# Altium PCB placa.pcbdoc
Units mm, origin at the board's own origin, x right, y up, seen from the top; angles counter-clockwise.
Board outline 140.97 x 110.49 mm, 2 copper layers (Top Layer, Bottom Layer); 32 components, 92 nets, 188 pads, 0 vias.
Unrouted connection lines stored in the file: 7.
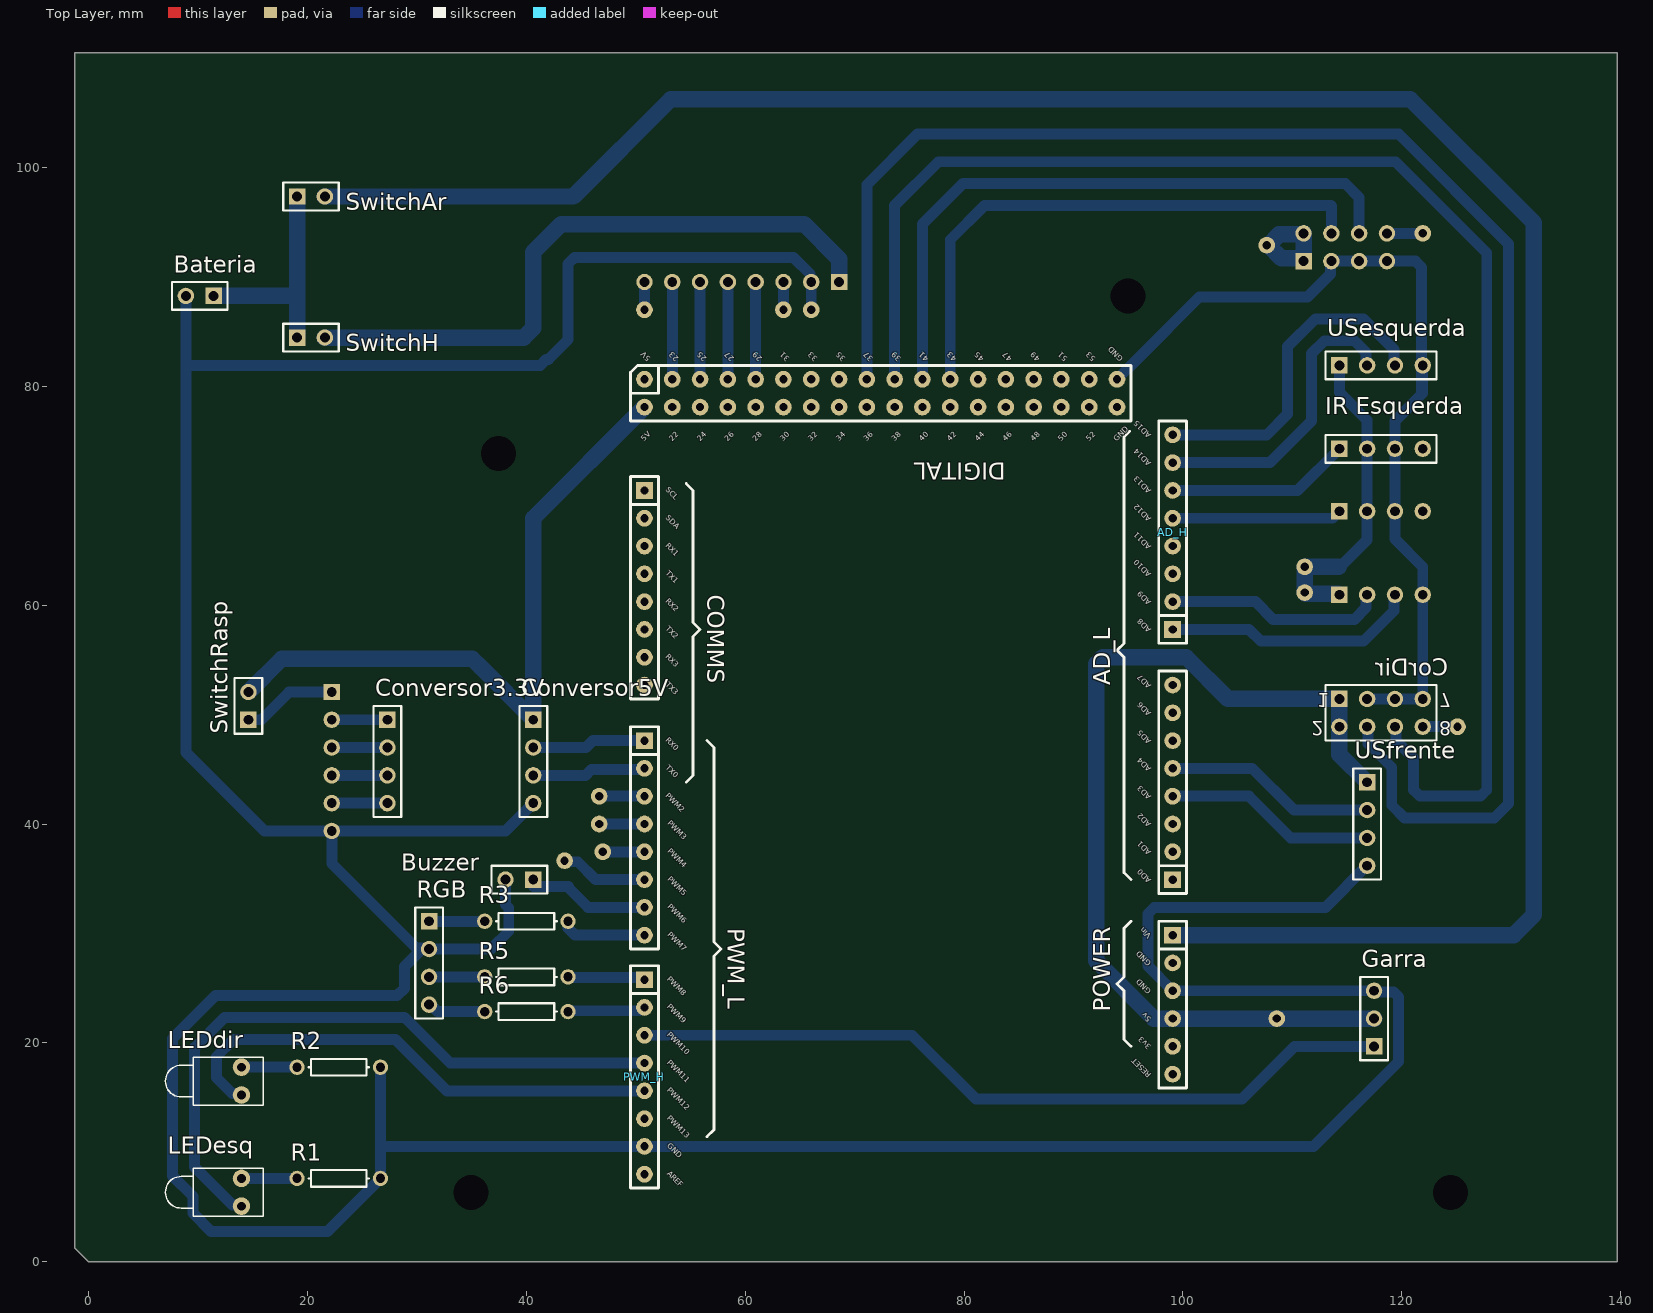
[diagram p0: Top Layer view]
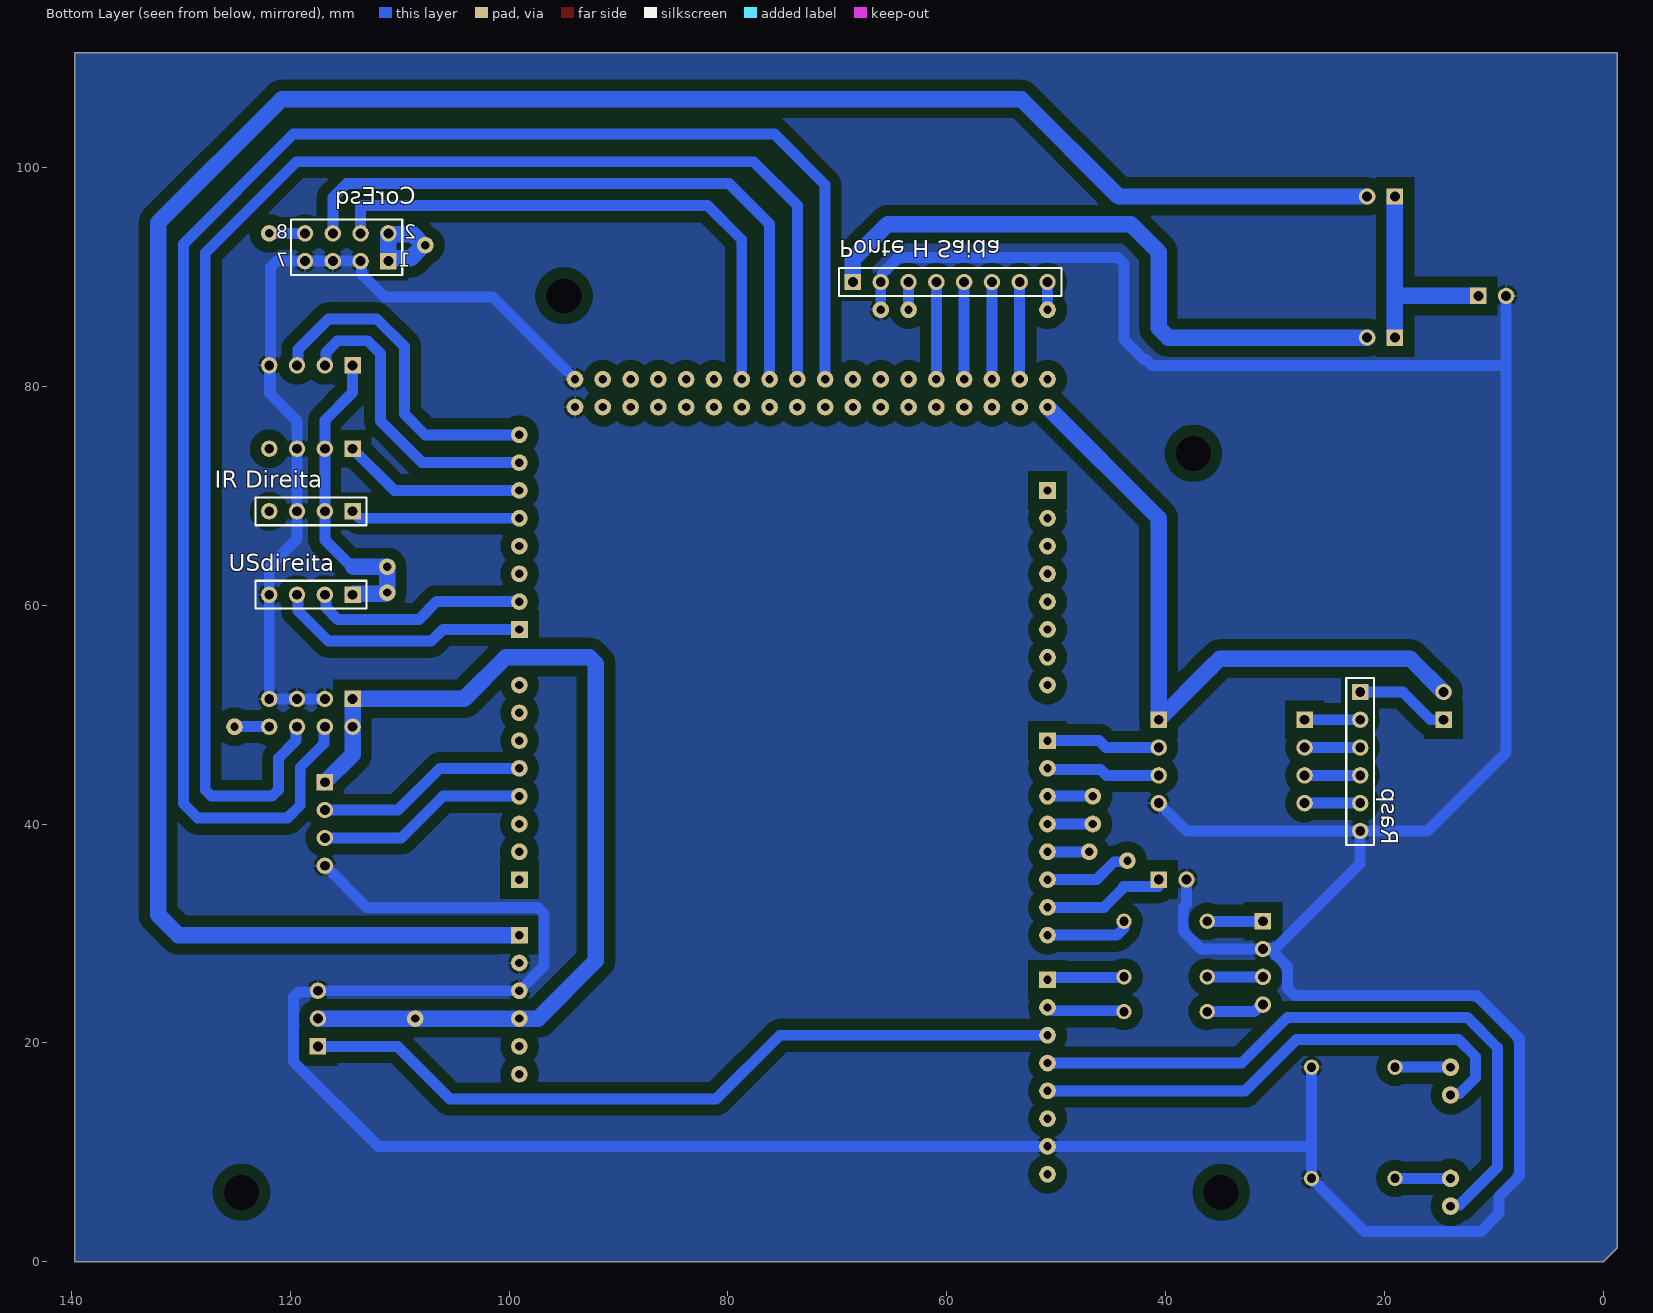
[diagram p1: Bottom Layer view, seen from below]

## Layer stack, top to bottom
Top Solder: solder mask 0.0102, Solder Resist, Dk 3.5
Top Layer: signal copper 0.0356
Dielectric1: dielectric 0.32, FR-4, Dk 4.8
Bottom Layer: signal copper 0.0356
Bottom Solder: solder mask 0.0102, Solder Resist, Dk 3.5

## Board outline
0,0 -1.27,1.27 -1.27,110.49 139.7,110.49 139.7,0

## Design rules (kind name [scope] priority, off if disabled: settings)
Clearance [All] p1: gap=1 ignorepadtopadclearanceinfootprint=FALSE
PolygonConnect [All] p1: connectstyle=Relief reliefconductorwidth=0.254 reliefentries=4 polygonreliefangle="90 Angle" airgapwidth=0.254
RoomDefinition AdruinoMegaSheild [InComponentClass('AdruinoMegaSheild')] p1: confinementstyle=ConfineOut formatcopy=TRUE lockcomponents=FALSE outline 78.105,41.91 78.105,55.88 73.533,55.88 73.533,41.91
RoutingLayers [All] p1: top layer_v5=FALSE bottom layer_v5=TRUE
RoutingVias [All] p1: holewidth=0.711 width=1.27 viastyle="Through Hole" minholewidth=0.711 minwidth=1.27 maxholewidth=0.711 maxwidth=1.27
SilkToSolderMaskClearance SilkscreenOverComponentPads [IsPad] p1: minsilkscreentomaskgap=0.254 clearancetoexposedcopper=TRUE
SolderMaskExpansion [All] p1: expansion=0.102
Width [All] p1: maxlimit=1.5 minlimit=0.8 preferedwidth=1
28 further rules are at their usual default settings.

## Components (designator, comment, footprint, x,y, rotation, side; value= is the part's Value field where it differs from the comment)
AD_H "AD_H" "Header 8x1 8.5mm" 99.06,57.785 r90 top locked
AD_L "AD_L" "Header 8x1 8.5mm" 99.06,34.925 r90 top locked
Bateria "Bateria" HDR1X2 11.43,88.265 r180 top
Buzzer "Header 2" HDR1X2 40.64,34.925 r180 top
COMMS "Communication" "Header 8x1 8.5mm" 50.8,70.485 r270 top
Conversor3.3V "Header 4" HDR1X4 27.305,49.53 r270 top
Conversor5V "Header 4" HDR1X4 40.64,49.53 r270 top
CorDir "Header 4X2" HDR2X4 114.3,51.435 r0 top
CorEsq "Header 4X2" HDR2X4 111.029,91.44 r0 bottom
DIGITAL "IO_36" "HEADER 36X 8MM" 50.8,80.645 r0 top locked
Garra "Header 3" HDR1X3 117.475,19.685 r90 top
"IR Direita" "Header 4" HDR1X4 114.3,68.58 r0 bottom
"IR Esquerda" "Header 4" HDR1X4 114.3,74.295 r0 top
LEDdir "LED1" LED-1 13.97,16.51 r180 top
LEDesq "LED1" LED-1 13.97,6.35 r180 top
"Ponte H Saida" "Header 8" HDR1X8 68.58,89.535 r180 bottom
POWER "POWER" "Header 6x1 8.5mm" 99.06,29.845 r270 top locked
PWM_H "PWM_H" "Header 8x1 8.5mm" 50.8,25.781 r270 top locked
PWM_L "PWM_L" "Header 8x1 8.5mm" 50.8,47.625 r270 top locked
R1 "Res1" AXIAL-0.3 22.86,7.62 r0 top value=47
R2 "Res1" AXIAL-0.3 22.86,17.78 r0 top value=47
R3 "res" AXIAL-0.3 40.005,31.115 r0 top value=330
R5 "res" AXIAL-0.3 40.005,26.035 r0 top value=330
R6 "res" AXIAL-0.3 40.005,22.86 r0 top value=330
Rasp "Header 6" HDR1X6 22.225,52.07 r270 bottom
RGB "Header 4" HDR1X4 31.115,31.115 r270 top
SwitchAr "Switch" HDR1X2 19.05,97.348 r0 top
SwitchH "Switch" HDR1X2 19.05,84.455 r0 top
SwitchRasp "Switch" HDR1X2 14.605,49.53 r90 top
USdireita "Header 4" HDR1X4 114.3,60.96 r0 bottom
USesquerda "Header 4" HDR1X4 114.3,81.915 r0 top
USfrente "Header 4" HDR1X4 116.84,43.815 r270 top

## Footprints (in the part's own frame and the unit in brackets; to place one, negate y for a bottom-side part, rotate by r counter-clockwise, add the part's x,y. Pads: shape width x height; smd on the part's side, far side on the other; paste and mask are expansions set on the pad)
AXIAL-0.3 [mm] "Axial Device, Thru-Hole; 2 Leads; 0.3 in Pin Spacing"
  round 1.4 hole 0.85: 1(-3.81,0) 2(3.81,0)
  silkscreen extent -2.77,-0.76 2.77,0.76
HDR1X2 [mm] "Connector; Header; 2 Position"
  rect 1.5x1.5 hole 0.9: 1(0,0)
  round 1.5 hole 0.9: 2(2.54,0)
  silkscreen extent -1.27,-1.27 3.81,1.27
HDR1X3 [mm] "Connector; Header; 3 Position"
  rect 1.5x1.5 hole 0.9: 1(0,0)
  round 1.5 hole 0.9: 2(2.54,0) 3(5.08,0)
  silkscreen extent -1.27,-1.27 6.35,1.27
HDR1X4 [mm] "Connector; Header; 4 Position"
  rect 1.5x1.5 hole 0.9: 1(0,0)
  round 1.5 hole 0.9: 2(2.54,0) 3(5.08,0) 4(7.62,0)
  silkscreen extent -1.27,-1.27 8.89,1.27
HDR1X6 [mm] "Connector; Header; 6 Position"
  rect 1.5x1.5 hole 0.9: 1(0,0)
  round 1.5 hole 0.9: 2(2.54,0) 3(5.08,0) 4(7.62,0) 5(10.16,0) 6(12.7,0)
  silkscreen extent -1.27,-1.27 13.97,1.27
HDR1X8 [mm] "Connector; Header; 8 Position"
  rect 1.5x1.5 hole 0.9: 1(0,0)
  round 1.5 hole 0.9: 2(2.54,0) 3(5.08,0) 4(7.62,0) 5(10.16,0) 6(12.7,0) 7(15.24,0) 8(17.78,0)
  silkscreen extent -1.27,-1.27 19.05,1.27
HDR2X4 [mm] "Connector; Header; 4x2 Position"
  rect 1.5x1.5 hole 0.9: 1(0,0)
  round 1.5 hole 0.9: 2(0,-2.54) 3(2.54,0) 4(2.54,-2.54) 5(5.08,0) 6(5.08,-2.54) 7(7.62,0) 8(7.62,-2.54)
  silkscreen extent -1.27,-3.81 8.89,1.27
"Header 6x1 8.5mm" [mil] "Stackable 6 pin header"
  rect 60x60 hole 30: 1(0,0)
  round 60 hole 30: 2(100,0) 3(200,0) 4(300,0) 5(400,0) 6(500,0)
  silkscreen extent -50,-50 550,50, body extent -50,-50 550,50, height 335
"Header 8x1 8.5mm" [mil] "Stackable 8 pin header"
  rect 60x60 hole 30: 1(0,0)
  round 60 hole 30: 2(100,0) 3(200,0) 4(300,0) 5(400,0) 6(500,0) 7(600,0) 8(700,0)
  silkscreen extent -50,-50 750,50, body extent -50,-50 750,50, height 335
"HEADER 36X 8MM" [mil] "Stackable 10 pin header"
  round 60 hole 30: 1(0,0) 2(0,-100) 3(100,0) 4(100,-100) 5(200,0) 6(200,-100) 7(300,0) 8(300,-100) 9(400,0) 10(400,-100) 11(500,0) 12(500,-100) 13(600,0) 14(600,-100) 15(700,0) 16(700,-100) 17(800,0) 18(800,-100) 19(900,-100) 20(900,0) 21(1000,0) 22(1000,-100) 23(1100,0) 24(1100,-100) 25(1200,0) 26(1200,-100) 27(1300,0) 28(1300,-100) 29(1400,0) 30(1400,-100) 31(1500,0) 32(1500,-100) 33(1600,0) 34(1600,-100) 35(1700,0) 36(1700,-100)
  silkscreen extent -50,-150 1750,50, body extent -50,-150 1750,50, height 335
LED-1 [mm] "LED; 2 Leads"
  round 1.6 hole 0.8: 1(0,1.27) 2(0,-1.27)
  silkscreen extent -2,-2.2 6.95,2.2

## Part data
Bateria SwitchAr SwitchH SwitchRasp: library part "Header 2", "Header, 2-Pin", LatestRevisionDate=17-Jul-2002, LatestRevisionNote="Re-released for DXP Platform.", Publisher="Altium Limited"
Buzzer: "Header, 2-Pin", LatestRevisionDate=17-Jul-2002, LatestRevisionNote="Re-released for DXP Platform.", Publisher="Altium Limited"
Conversor3.3V Conversor5V "IR Direita" "IR Esquerda" RGB USdireita USesquerda USfrente: "Header, 4-Pin", LatestRevisionDate=17-Jul-2002, LatestRevisionNote="Re-released for DXP Platform.", Publisher="Altium Limited"
CorDir CorEsq: "Header, 4-Pin, Dual row", LatestRevisionDate=17-Jul-2002, LatestRevisionNote="Re-released for DXP Platform.", Publisher="Altium Limited"
Garra: "Header, 3-Pin", LatestRevisionDate=17-Jul-2002, LatestRevisionNote="Re-released for DXP Platform.", Publisher="Altium Limited"
LEDdir LEDesq: "Typical RED GaAs LED", LatestRevisionDate=08-Jul-2005, LatestRevisionNote="Mech Layer 1 removed.", PackageDescription="LED; 2 Leads", PackageReference=LED-1, Published=8-Jun-2000, Publisher="Altium Limited"
"Ponte H Saida": "Header, 8-Pin", LatestRevisionDate=17-Jul-2002, LatestRevisionNote="Re-released for DXP Platform.", Publisher="Altium Limited"
R1 R2: "Resistor", LatestRevisionDate=17-Jul-2002, LatestRevisionNote="Re-released for DXP Platform.", PackageDescription="Axial Device, Thru-Hole; 2 Leads; 0.3 in Pin Spacing", PackageReference=AXIAL-0.3, Published=8-Jun-2000, Publisher="Altium Limited"
R3 R5 R6: library part Res1, "Resistor", LatestRevisionDate=17-Jul-2002, LatestRevisionNote="Re-released for DXP Platform.", PackageDescription="Axial Device, Thru-Hole; 2 Leads; 0.3 in Pin Spacing", PackageReference=AXIAL-0.3, Published=8-Jun-2000, Publisher="Altium Limited"
Rasp: "Header, 6-Pin", LatestRevisionDate=17-Jul-2002, LatestRevisionNote="Re-released for DXP Platform.", Publisher="Altium Limited"

## Free pads (board coordinates)
  round 1.6 hole 3.2: 0(34.925,6.35) 0(37.465,73.879) 0(94.988,88.265) 0(124.46,6.35)
  round 1.524 hole 0.762: 2(46.656,42.545) 3(46.656,40.005) 4(50.8,86.995) 5(63.5,86.995) 6(66.04,86.995) 9(125.095,48.895) 10(121.92,93.98) 11(46.99,37.465) 12(43.497,36.657) 13(107.662,92.903) 14(111.125,63.5) 15(111.125,61.153) 16(108.585,22.225)

## Nets (pads, with @x,y where several pads share a name; then routed paths per layer and width w, separated by ;. In a path a pad name is that pad's centre, name@x,y a point inside that pad or via, vN(x,y) a via of type N, cw(c..) or ccw(c..) an arc to the next point about the centre after c; other vN are vias at no path point)
3V3: POWER.5
5V: "IR Direita.2" "IR Esquerda.2" Conversor5V.1 CorDir.1 CorDir.2 CorEsq.1 CorEsq.2 DIGITAL.1 DIGITAL.2 Garra.2 pad.13 pad.14 pad.15 pad.16 POWER.4 SwitchRasp.2 USdireita.1 USesquerda.1 USfrente.1 | length 189.4
  Bottom Layer w1: pad.13 pad.13@107.803,92.903 ; CorEsq.1@110.779,91.69 CorEsq.1 ; CorEsq.2@110.934,93.884 CorEsq.2 ; pad.15 pad.15@111.222,61.057 ; USdireita.1@114.203,61.057 USdireita.1 ; 114.232,63.5 114.3,63.432 116.84,65.972 116.84,68.58 116.84,74.295 116.84,76.903 114.3,79.443 USesquerda.1
  Bottom Layer w1.5: SwitchRasp.2 17.648,55.113 35.057,55.113 35.85,54.32 Conversor5V.1 40.64,67.945 DIGITAL.2 ; CorEsq.1@110.779,91.69 109.017,91.69 107.803,92.903 108.784,93.884 CorEsq.2@110.934,93.884 ; CorEsq.1 CorEsq.2 ; pad.15 pad.14 114.232,63.5 ; pad.15@111.222,61.057 USdireita.1@114.203,61.057 ; USfrente.1 114.3,46.355 CorDir.2 CorDir.1 104.115,51.435 100.305,55.245 92.661,55.245 92.075,54.659 92.075,27.498 97.348,22.225 POWER.4 pad.16 Garra.2
AD0: AD_L.1
AD1: AD_L.2
AD2: AD_L.3
AD3: AD_L.4 USfrente.3 | length 19.4
  Bottom Layer w1: AD_L.4 106.048,42.545 109.858,38.735 USfrente.3
AD4: AD_L.5 USfrente.2 | length 19.4
  Bottom Layer w1: AD_L.5 106.337,45.085 110.147,41.275 USfrente.2
AD5: AD_L.6
AD6: AD_L.7
AD7: AD_L.8
AD8: AD_H.1 USdireita.3 | length 23.3
  Bottom Layer w1: AD_H.1 106.048,57.785 107.123,56.71 116.5,56.71 119.284,59.495 119.284,60.864 USdireita.3
AD9: AD_H.2 USdireita.2 | length 20
  Bottom Layer w1: AD_H.2 106.629,60.325 108.244,58.71 115.671,58.71 116.744,59.783 116.744,60.864 USdireita.2
AD10: AD_H.3
AD11: AD_H.4
AD12: "IR Direita.1" AD_H.5 | length 15.5
  Bottom Layer w1: AD_H.5 113.665,67.945 114.3,68.58
AD13: "IR Esquerda.1" AD_H.6 | length 16.8
  Bottom Layer w1: AD_H.6 110.49,70.485 114.3,74.295
AD14: AD_H.7 USesquerda.2 | length 27.6
  Bottom Layer w1: AD_H.7 107.95,73.025 111.76,76.835 111.76,82.996 112.929,84.165 115.671,84.165 116.744,83.092 116.744,82.011 USesquerda.2
AD15: AD_H.8 USesquerda.3 | length 30.9
  Bottom Layer w1: AD_H.8 107.662,75.565 109.567,77.47 109.567,83.631 112.1,86.165 116.5,86.165 119.284,83.38 119.284,82.011 USesquerda.3
AGND: Conversor3.3V.4 Rasp.5 | length 5.1
  Bottom Layer w1: Rasp.5 Conversor3.3V.4
AREF: PWM_H.8
ASCL: Conversor3.3V.2 Rasp.3 | length 5.1
  Bottom Layer w1: Rasp.3 Conversor3.3V.2
ASDA: Conversor3.3V.3 Rasp.4 | length 5.1
  Bottom Layer w1: Rasp.4 Conversor3.3V.3
AVCC: Conversor3.3V.1 Rasp.2 | length 5.1
  Bottom Layer w1: Rasp.2 Conversor3.3V.1
GND: "IR Direita.3" "IR Esquerda.3" "Ponte H Saida.2" Bateria.2 Buzzer.2 Conversor5V.4 CorDir.3 CorDir.5 CorDir.7 CorEsq.3 CorEsq.5 CorEsq.7 DIGITAL.35 DIGITAL.36 Garra.3 pad.6 POWER.2 POWER.3 PWM_H.7 R1.2 R2.2 Rasp.6 RGB.2 USdireita.4 USesquerda.4 USfrente.4 | length 482.9
  Bottom Layer w1: Bateria.2 8.89,81.915 ; R2.2 26.67,10.541 ; RGB.2@30.377,28.479 28.865,26.967 28.865,24.985 28.2,24.32 11.6,24.32 7.67,20.39 7.67,7.839 9.525,5.984 9.525,4.445 11.19,2.78 21.83,2.78 R1.2 26.67,10.541 ; Buzzer.2 38.1,32.644 38.395,32.349 38.395,30.204 36.766,28.575 RGB.2 31.019,28.671 29.938,28.671 22.225,36.384 Rasp.6 ; Conversor5V.4 38.1,39.37 Rasp.6 ; 65.944,90.273 64.432,91.785 44.401,91.785 43.815,91.199 43.815,84.262 42.008,82.455 41.815,82.455 41.275,81.915 8.89,81.915 ; pad.6 66.04,89.535 ; DIGITAL.35 95.885,82.55 101.5,88.165 111.376,88.165 113.474,90.263 113.474,91.344 CorEsq.3 CorEsq.5 CorEsq.7 121.239,91.44 121.824,90.854 121.824,79.375 ; USfrente.4 113.03,32.385 97.384,32.385 96.798,31.799 96.798,27.027 POWER.3 Garra.3 117.571,24.669 119.235,24.669 119.725,24.179 119.725,18.314 111.952,10.541 PWM_H.7 26.67,10.541 ; CorDir.3 CorDir.5 CorDir.7 USdireita.4 121.92,63.5 119.38,66.04 119.38,68.58 119.38,74.295 119.38,76.835 121.92,79.375 USesquerda.4 ; 8.89,81.915 8.89,46.544 16.064,39.37 Rasp.6
Input: "Ponte H Saida.1" SwitchH.2 | length 58.8
  Bottom Layer w1.5: SwitchH.2 39.761,84.455 40.64,85.334 40.64,92.268 43.196,94.824 65.389,94.824 68.58,91.633 68.58,89.535
IO22: DIGITAL.4
IO23: "Ponte H Saida.7" DIGITAL.3 | length 8.9
  Bottom Layer w1: DIGITAL.3 53.34,89.535
IO24: DIGITAL.6
IO25: "Ponte H Saida.6" DIGITAL.5 | length 8.9
  Bottom Layer w1: DIGITAL.5 55.88,89.535
IO26: DIGITAL.8
IO27: "Ponte H Saida.5" DIGITAL.7 | length 8.9
  Bottom Layer w1: DIGITAL.7 58.42,89.535
IO28: DIGITAL.10
IO29: "Ponte H Saida.4" DIGITAL.9 | length 8.9
  Bottom Layer w1: DIGITAL.9 60.96,89.535
IO30: DIGITAL.12
IO31: DIGITAL.11
IO32: DIGITAL.14
IO33: DIGITAL.13
IO34: DIGITAL.16
IO35: DIGITAL.15
IO36: DIGITAL.18
IO37: CorDir.4 DIGITAL.17 | length 153.5
  Bottom Layer w1: DIGITAL.17 71.12,98.425 75.758,103.063 119.73,103.063 129.77,93.023 129.77,41.861 128.455,40.545 120.262,40.545 119.09,41.717 119.09,45.186 116.936,47.341 116.936,48.799 CorDir.4
IO38: DIGITAL.19
IO39: CorDir.6 DIGITAL.20 | length 137.8
  Bottom Layer w1: DIGITAL.20 73.66,96.52 77.663,100.523 119.442,100.523 127.77,92.195 127.77,43.131 127.185,42.545 121.676,42.545 121.09,43.131 121.09,46.015 119.476,47.629 119.476,48.799 CorDir.6
IO40: DIGITAL.22
IO41: CorEsq.6 DIGITAL.21 | length 59.6
  Bottom Layer w1: DIGITAL.21 76.2,94.824 79.899,98.523 114.836,98.523 116.109,97.251 CorEsq.6 CorEsq.6@116.014,94.076
IO42: DIGITAL.24
IO43: CorEsq.4 DIGITAL.23 | length 51.5
  Bottom Layer w1: DIGITAL.23 78.74,93.394 81.869,96.523 113.523,96.523 113.569,96.477 CorEsq.4 CorEsq.4@113.474,94.076
IO44: DIGITAL.26
IO45: DIGITAL.25
IO46: DIGITAL.28
IO47: DIGITAL.27
IO48: DIGITAL.30
IO49: DIGITAL.29
IO50: DIGITAL.32
IO51: DIGITAL.31
IO52: DIGITAL.34
IO53: DIGITAL.33
NetBateria_1: Bateria.1 SwitchAr.1 SwitchH.1 | length 20.5
  Bottom Layer w1.5: Bateria.1 19.05,88.265 ; SwitchH.1 19.05,88.265 ; SwitchAr.1 19.05,88.265
NetLEDdir_2: LEDdir.2 R2.1 | length 5.1
  Bottom Layer w1: LEDdir.2 R2.1
NetLEDesq_2: LEDesq.2 R1.1 | length 5.1
  Bottom Layer w1: LEDesq.2 R1.1
NetR3_1: R3.1 RGB.1 | length 5.1
  Bottom Layer w1: RGB.1 R3.1
NetR5_1: R5.1 RGB.3 | length 5.1
  Bottom Layer w1: RGB.3 R5.1
NetR6_1: R6.1 RGB.4 | length 5.3
  Bottom Layer w1: RGB.4 31.25,23.495 31.885,22.86 R6.1
NetRasp_1: Rasp.1 SwitchRasp.1 | length 8.7
  Bottom Layer w1: SwitchRasp.1 15.792,49.53 18.332,52.07 Rasp.1
PWM2: pad.2 PWM_L.3 | length 4.1
  Bottom Layer w1: pad.2 PWM_L.3
PWM2J: "Ponte H Saida.8" pad.4 | length 2.5
  Bottom Layer w1: pad.4 50.8,89.535
PWM3: pad.3 PWM_L.4 | length 4.1
  Bottom Layer w1: pad.3 PWM_L.4
PWM3J: "Ponte H Saida.3" pad.5 | length 2.5
  Bottom Layer w1: pad.5 63.5,89.535
PWM4: pad.11 PWM_L.5 | length 3.8
  Bottom Layer w1: pad.11 PWM_L.5
PWM4J: CorDir.8 pad.9 | length 3.2
  Bottom Layer w1: CorDir.8 pad.9
PWM5: pad.12 PWM_L.6 | length 8
  Bottom Layer w1: pad.12 43.598,36.556 44.7,36.556 46.331,34.925 PWM_L.6
PWM5J: CorEsq.8 pad.10 | length 3.3
  Bottom Layer w1: CorEsq.8 pad.10
PWM6: Buzzer.1 PWM_L.7 | length 11.6
  Bottom Layer w1: Buzzer.1 40.64,34.29 43.861,34.29 43.861,34.18 45.656,32.385 PWM_L.7
PWM7: PWM_L.8 R3.2 | length 7.9
  Bottom Layer w1: R3.2 43.815,30.48 44.45,29.845 PWM_L.8
PWM8: PWM_H.1 R5.2 | length 7.1
  Bottom Layer w1: R5.2 43.892,25.958 50.623,25.958 PWM_H.1
PWM9: PWM_H.2 R6.2 | length 7.1
  Bottom Layer w1: R6.2 43.892,22.937 50.354,22.937 50.658,23.241 PWM_H.2
PWM10: Garra.1 PWM_H.3 | length 71.1
  Bottom Layer w1: PWM_H.3 75.261,20.701 81.079,14.883 105.398,14.883 110.2,19.685 Garra.1
PWM11: LEDesq.1 PWM_H.4 | length 60.7
  Bottom Layer w1: LEDesq.1 13.855,5.195 13.143,5.195 9.67,8.667 9.67,19.561 12.429,22.32 28.888,22.32 33.047,18.161 PWM_H.4
PWM12: LEDdir.1 PWM_H.5 | length 46.6
  Bottom Layer w1: LEDdir.1 13.855,15.355 13.143,15.355 11.67,16.827 11.67,18.733 13.257,20.32 28.06,20.32 32.759,15.621 PWM_H.5
PWM13: PWM_H.6
RESET: POWER.6
RX0: Conversor5V.2 PWM_L.1 | length 10.4
  Bottom Layer w1: Conversor5V.2 45.47,46.99 46.105,47.625 PWM_L.1
RX1: COMMS.3
RX2: COMMS.5
RX3: COMMS.7
SCL: COMMS.1
SDA: COMMS.2
TX0: Conversor5V.3 PWM_L.2 | length 10.4
  Bottom Layer w1: Conversor5V.3 45.399,44.45 45.939,44.99 50.705,44.99 PWM_L.2
TX1: COMMS.4
TX2: COMMS.6
TX3: COMMS.8
VIN: POWER.1 SwitchAr.2 | length 215.9
  Bottom Layer w1.5: SwitchAr.2 44.307,97.348 53.197,106.238 120.785,106.238 132.08,94.944 132.08,31.701 130.224,29.845 POWER.1
pads on no net: "IR Direita.4" "IR Esquerda.4"

## Polygon pours and split planes (outlines as drawn)
GND on Bottom Layer "GND_L02_P002" (solid, pour order 2): 0,0 -1.27,1.27 -1.27,110.49 139.7,110.49 139.7,0

## Silkscreen, mask and mechanical layers (free items; w line width, h text height)
Top Overlay:
  lines w0.254: 54.61,43.815 55.245,44.45 55.245,57.15 55.88,57.785 55.245,58.42 55.245,70.485 54.61,71.12 ; 56.515,11.43 57.15,12.065 57.15,27.94 57.785,28.575 57.15,29.21 57.15,46.99 56.515,47.625 ; 95.117,75.888 94.615,75.385 94.615,56.515 93.98,55.88 94.615,55.245 94.615,35.56 95.25,34.925 ; 95.25,19.685 94.615,20.32 94.615,24.765 93.98,25.4 94.615,26.035 94.615,30.48 95.25,31.115
  text "5V" at 51.435,82.55 h0.51 r135
  text "23" at 53.975,82.55 h0.51 r135
  text "25" at 56.515,82.55 h0.51 r135
  text "27" at 59.055,82.55 h0.51 r135
  text "29" at 61.595,82.55 h0.51 r135
  text "31" at 64.135,82.55 h0.51 r135
  text "33" at 66.675,82.55 h0.51 r135
  text "35" at 69.215,82.55 h0.51 r135
  text "37" at 71.755,82.55 h0.51 r135
  text "39" at 74.295,82.55 h0.51 r135
  text "41" at 76.835,82.55 h0.51 r135
  text "43" at 79.375,82.55 h0.51 r135
  text "45" at 81.915,82.55 h0.51 r135
  text "47" at 84.455,82.55 h0.51 r135
  text "49" at 86.995,82.55 h0.51 r135
  text "51" at 89.535,82.55 h0.51 r135
  text "53" at 92.075,82.55 h0.51 r135
  text "GND" at 94.615,82.55 h0.51 r135
  text "AD15" at 97.155,75.565 h0.51 r135
  text "5V" at 50.8,74.93 h0.51 r45
  text "22" at 53.34,74.93 h0.51 r45
  text "24" at 55.88,74.93 h0.51 r45
  text "26" at 58.42,74.93 h0.51 r45
  text "28" at 60.96,74.93 h0.51 r45
  text "30" at 63.5,74.93 h0.51 r45
  text "32" at 66.04,74.93 h0.51 r45
  text "34" at 68.58,74.93 h0.51 r45
  text "36" at 71.12,74.93 h0.51 r45
  text "38" at 73.66,74.93 h0.51 r45
  text "40" at 76.2,74.93 h0.51 r45
  text "42" at 78.74,74.93 h0.51 r45
  text "44" at 81.28,74.93 h0.51 r45
  text "46" at 83.82,74.93 h0.51 r45
  text "48" at 86.36,74.93 h0.51 r45
  text "50" at 88.9,74.93 h0.51 r45
  text "52" at 91.44,74.93 h0.51 r45
  text "GND" at 93.98,74.93 h0.51 r45
  text "AD14" at 97.155,73.025 h0.51 r135
  text "SCL" at 52.705,70.485 h0.51 r315
  text "AD13" at 97.155,70.485 h0.51 r135
  text "SDA" at 52.705,67.945 h0.51 r315
  text "AD12" at 97.155,67.945 h0.51 r135
  text "RX1" at 52.705,65.405 h0.51 r315
  text "AD11" at 97.155,65.405 h0.51 r135
  text "TX1" at 52.705,62.865 h0.51 r315
  text "AD10" at 97.155,62.865 h0.51 r135
  text "RX2" at 52.705,60.325 h0.51 r315
  text "AD9" at 97.155,60.325 h0.51 r135
  text "TX2" at 52.705,57.785 h0.51 r315
  text "AD8" at 97.155,57.785 h0.51 r135
  text "RX3" at 52.705,55.245 h0.51 r315
  text "TX3" at 52.705,52.705 h0.51 r315
  text "AD7" at 97.155,52.705 h0.51 r135
  text "AD6" at 97.155,50.165 h0.51 r135
  text "RX0" at 52.705,47.625 h0.51 r315
  text "AD5" at 97.155,47.625 h0.51 r135
  text "TX0" at 52.705,45.085 h0.51 r315
  text "AD4" at 97.155,45.085 h0.51 r135
  text "PWM2" at 52.705,42.545 h0.51 r315
  text "AD3" at 97.155,42.545 h0.51 r135
  text "PWM3" at 52.885,40.005 h0.51 r315
  text "AD2" at 97.155,40.005 h0.51 r135
  text "PWM4" at 52.885,37.465 h0.51 r315
  text "AD1" at 97.155,37.465 h0.51 r135
  text "PWM5" at 52.885,34.925 h0.51 r315
  text "AD0" at 97.155,34.925 h0.51 r135
  text "PWM6" at 52.885,32.385 h0.51 r315
  text "PWM7" at 52.885,29.845 h0.51 r315
  text "Vin" at 97.155,29.845 h0.51 r135
  text "GND" at 97.155,27.305 h0.51 r135
  text "PWM8" at 52.832,25.781 h0.51 r315
  text "GND" at 97.155,24.765 h0.51 r135
  text "PWM9" at 52.832,23.241 h0.51 r315
  text "5v" at 97.155,22.225 h0.51 r135
  text "PWM10" at 52.832,20.701 h0.51 r315
  text "3v3" at 97.155,19.685 h0.51 r135
  text "PWM11" at 52.832,18.161 h0.51 r315
  text "RESET" at 97.155,17.145 h0.51 r135
  text "PWM12" at 52.832,15.621 h0.51 r315
  text "PWM13" at 52.832,13.081 h0.51 r315
  text "GND" at 52.832,10.541 h0.51 r315
  text "AREF" at 52.832,8.001 h0.51 r315
Mechanical 1:
  lines w0.127: 48.26,-15.875 101.6,-15.875 101.6,83.185 100.33,83.185 97.79,85.725 63.5,85.725 60.96,83.185 50.8,83.185 48.26,80.645 48.26,-15.875

## Text inside footprints (layer, text, board x,y; h text height)
CorDir: Top Overlay "8" at 123.444,49.403 h1.27 r180; Top Overlay "7" at 123.444,51.943 h1.27 r180; Top Overlay "1" at 112.268,51.943 h1.27 r180; Top Overlay "2" at 111.76,49.403 h1.27 r180
CorEsq: Bottom Overlay "8" at 120.173,93.472 h1.27; Bottom Overlay "7" at 120.173,90.932 h1.27; Bottom Overlay "1" at 108.997,90.932 h1.27; Bottom Overlay "2" at 108.489,93.472 h1.27